# Altium PCB PCB1.PcbDoc
Units mm, origin at the board's own origin, x right, y up, seen from the top; angles counter-clockwise.
Board outline 120 x 60 mm, 2 copper layers (Top Layer, Bottom Layer); 33 components, 25 nets, 108 pads, 0 vias.
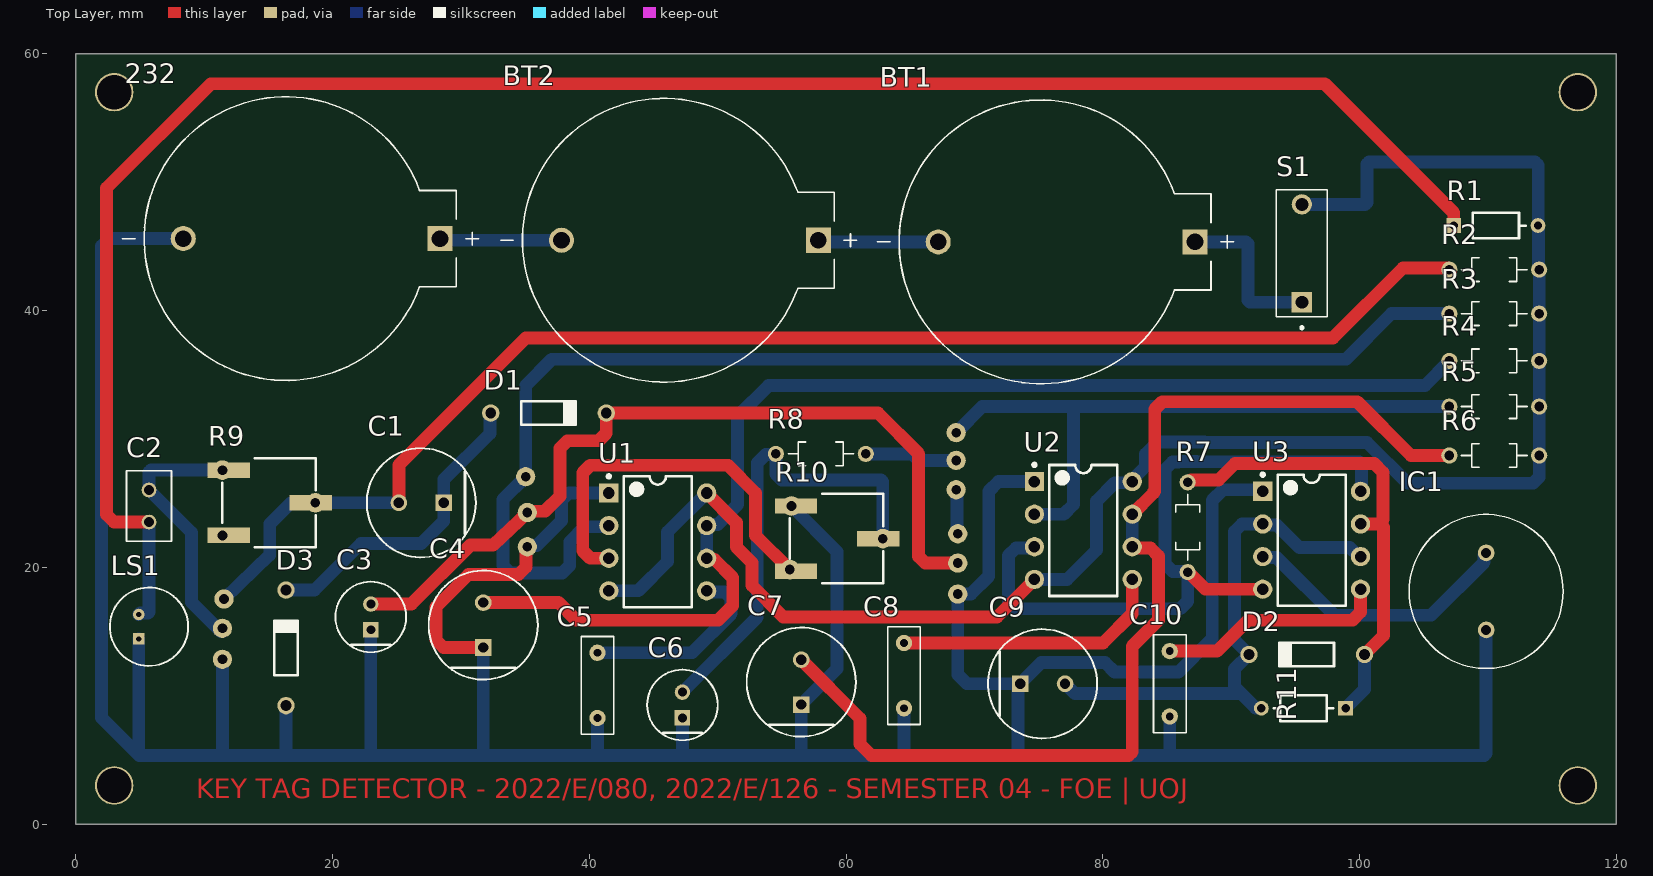
[diagram p0: Top Layer view]
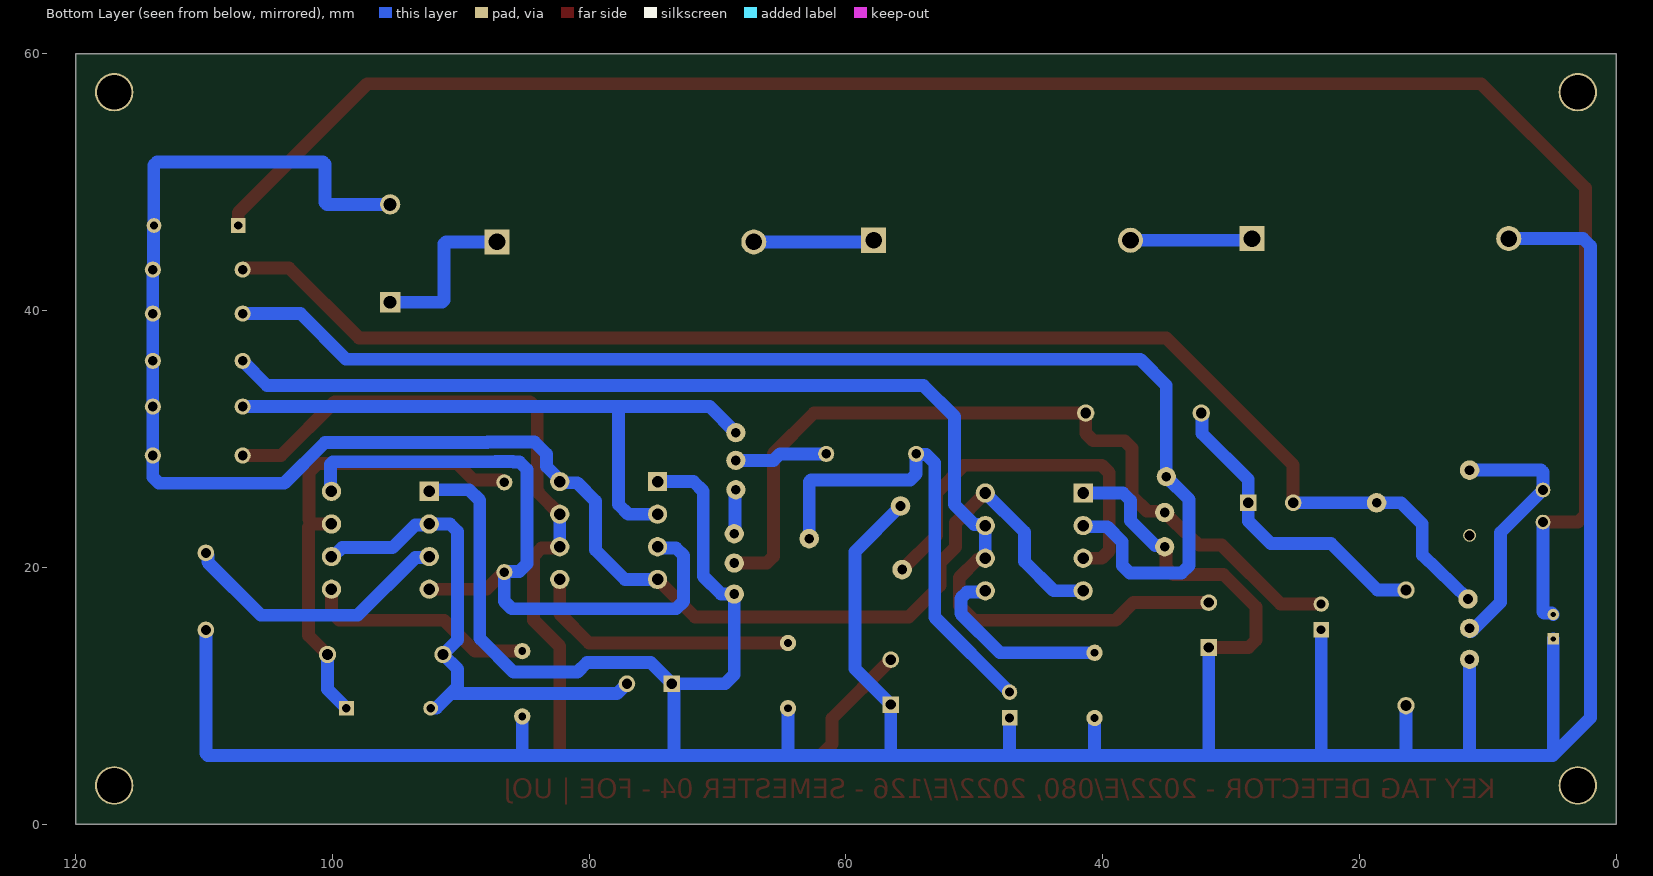
[diagram p1: Bottom Layer view, seen from below]

## Layer stack, top to bottom
Top Solder: solder mask 0.0102, Solder Resist, Dk 3.5
Top Layer: signal copper 0.0356
Dielectric 1: dielectric 0.32, FR-4, Dk 4.8
Bottom Layer: signal copper 0.0356
Bottom Solder: solder mask 0.0102, Solder Resist, Dk 3.5

## Board outline
0,0 0,60 120,60 120,0

## Design rules (kind name [scope] priority, off if disabled: settings)
Clearance [All] p1: gap=0.254 ignorepadtopadclearanceinfootprint=FALSE except(0.5: Arc-Arc Arc-Track Arc-SMDPad Arc-THPad Track-Track Track-SMDPad Track-THPad)
ComponentClearance [All] p1: gap=1 collisioncheckmode=3 verticalgap=1 showdistances=TRUE
PolygonConnect [All] p1: connectstyle=Relief reliefconductorwidth=0.254 reliefentries=4 polygonreliefangle="90 Angle" airgapwidth=0.254
RoutingLayers RoutingLayers_1 [InNetClass('Bottom only')] p1: top layer_v5=TRUE bottom layer_v5=TRUE
RoutingLayers [All] p2: top layer_v5=TRUE bottom layer_v5=TRUE
RoutingVias [All] p1: holewidth=0.711 width=1.27 viastyle="Through Hole" minholewidth=0.711 minwidth=1.27 maxholewidth=0.711 maxwidth=1.27
SolderMaskExpansion [All] p1: expansion=0.102 istentingtop=FALSE
SupplyNets "Schematic Supply Nets" [InNet('GND')] p1: voltage=0.000
UnRoutedNet [All] p1: checkbadconnections=TRUE
Width [All] p1: maxlimit=2 minlimit=1 preferedwidth=1
27 further rules are at their usual default settings.

## Components (designator, comment, footprint, x,y, rotation, side; value= is the part's Value field where it differs from the comment)
232 "BH-25C-1" BAT_BH-25C-1 16.383,45.593 r0 top
BT1 "BH-25C-1" BAT_BH-25C-1 75.183,45.339 r0 top
BT2 "BH-25C-1" BAT_BH-25C-1 45.846,45.466 r0 top
C1 "ECA-2WHG010" FP-ECA-2WHG010-MFG 26.924,25.019 r180 top
C2 "FA16X7R2A224KNU06" CAPRB250W50L550T350H600 5.715,24.765 r90 top
C3 "ECA1JM100" FP-RAD-TH-D_5_0_5-L_11_1-MFG 22.987,16.129 r90 top
C4 "EEUFR1H101" FP-RAD-TH-D_8_0_5-L_11_5-MFG 31.75,15.494 r90 top
C5 "C320C104M1U5TA" LEADED_DECOUPLING_CAP(.1) 40.64,10.795 r270 top
C6 "ECA1JM100" FP-RAD-TH-D_5_0_5-L_11_1-MFG 47.26,9.271 r90 top
C7 "EEUFR1H101" FP-RAD-TH-D_8_0_5-L_11_5-MFG 56.515,11.049 r90 top
C8 "C320C104M1U5TA" LEADED_DECOUPLING_CAP(.1) 64.516,11.557 r270 top
C9 "EEUFR1H101" FP-RAD-TH-D_8_0_5-L_11_5-MFG 75.311,10.922 r0 top
C10 "C320C104M1U5TA" LEADED_DECOUPLING_CAP(.1) 85.217,10.922 r270 top
D1 "1N4148" NXP-SOD27-2_V 36.83,32.004 r0 top
D2 "1N4148" NXP-SOD27-2_V 95.885,13.208 r180 top
D3 "1N4148" NXP-SOD27-2_V 16.383,13.716 r90 top
IC1 "TMB12A12" TMB12A12 109.855,21.113 r270 top
LS1 "POM-2738P-R" FP-POM-2738P-R-MFG 5.715,15.367 r90 top value=2.2kΩ
R1 "CF18JT10K0" FP-CF18-MFG 110.617,46.609 r0 top value=10kΩ
R2 "2-1623928-8" RESAD700W45L350D185 110.49,43.18 r0 top
R3 "2-1623927-3" RESAD700W45L350D185 110.49,39.751 r0 top
R4 "5-1623927-8" RESAD700W45L350D185 110.49,36.068 r0 top
R5 "2-1623928-5" RESAD700W45L350D185 110.49,32.512 r0 top
R6 "CFR16J100K" RESAD700W45L350D185 110.49,28.702 r0 top
R7 "5-1623927-0" RESAD700W45L350D185 86.614,23.114 r270 top
R8 "2-1623928-5" RESAD700W45L350D185 58.039,28.829 r0 top
R9 "3361P-1-104GLF" FP-3361P-MFG 15.113,25.019 r270 top
R10 "3361P-1-104GLF" FP-3361P-MFG 59.309,22.225 r270 top
R11 "CF18JT10K0" FP-CF18-MFG 95.631,9.017 r180 top value=10kΩ
S1 "DS01-254-L-01BE" SW_DS01-254-L-01BE 95.504,44.45 r0 top
U1 "NE555P" P0008A 45.339,21.971 r0 top
U2 "NE555P" P0008A 78.486,22.86 r0 top
U3 "NE555P" P0008A 96.266,22.098 r0 top

## Footprints (in the part's own frame and the unit in brackets; to place one, negate y for a bottom-side part, rotate by r counter-clockwise, add the part's x,y. Pads: shape width x height; smd on the part's side, far side on the other; paste and mask are expansions set on the pad)
BAT_BH-25C-1 [mm]
  round 1.95 hole 1.3: N(-8,0)
  rect 1.95x1.95 / inner round 1.95 / far side rect 1.95x1.95 hole 1.3: P(12,0)
  silkscreen extent -12.75,-11.05 15,11.05
CAPRB250W50L550T350H600 [mm]
  round 1.15 hole 0.8: 1(-1.25,0) 2(1.25,0)
  silkscreen extent -2.75,-1.75 2.75,1.75, body extent -2.75,-1.75 2.75,1.75, height 3
FP-3361P-MFG [mm]
  rect 1.19x3.3 smd paste+0 mask+0: 1(-2.54,-3.2) 2(0,3.2) 3(2.54,-3.2)
  silkscreen extent -3.48,-3.69 3.48,3.6, body extent -3.58,-4.95 3.58,4.95, height 0.25
FP-CF18-MFG [mm]
  rect 1.15x1.15 hole 0.65 paste-2539.97 mask+0: 1(-3.28,0)
  round 1.15 hole 0.65 paste-2539.97 mask+0: 2(3.28,0)
  silkscreen extent -2.3,-1 2.3,1, body extent -3.96,-1.1 3.96,1.1, height 0.25
FP-ECA-2WHG010-MFG [mm]
  rect 1.3x1.3 hole 0.8 paste-2539.97 mask+0: 1(-1.75,0)
  round 1.3 hole 0.8 paste-2539.97 mask+0: 2(1.75,0)
  silkscreen extent -4.25,-4.25 4.25,4.25, body extent -4.35,-4.35 4.35,4.35, height 0.25
FP-POM-2738P-R-MFG [mm]
  rect 0.9x0.9 hole 0.4 paste-2539.97 mask+0: 1(-0.95,0.8)
  round 0.9 hole 0.4 paste-2539.97 mask+0: 2(0.95,0.8)
  silkscreen extent -3.05,-3.05 3.05,3.05, body extent -3.15,-3.15 3.15,3.15, height 0.25
FP-RAD-TH-D_5_0_5-L_11_1-MFG [mm]
  rect 1.2x1.2 hole 0.7 paste-2539.97 mask+0: 1(-1,0)
  round 1.2 hole 0.7 paste-2539.97 mask+0: 2(1,0)
  silkscreen extent -2.75,-2.75 2.75,2.75, body extent -2.85,-2.85 2.85,2.85, height 0.25
FP-RAD-TH-D_8_0_5-L_11_5-MFG [mm]
  rect 1.3x1.3 hole 0.8 paste-2539.97 mask+0: 1(-1.75,0)
  round 1.3 hole 0.8 paste-2539.97 mask+0: 2(1.75,0)
  silkscreen extent -4.25,-4.25 4.25,4.25, body extent -4.35,-4.35 4.35,4.35, height 0.25
LEADED_DECOUPLING_CAP(.1) [mil]
  round 50 hole 24: 1(-100,0) 2(100,0)
  silkscreen extent -150,-50 150,50
NXP-SOD27-2_V [mm] "SOD27, 2-Leads, Dia 1.85mm, Body Length 4.25mm, Pin Spacing 9mm"
  round 1.35 hole 0.85: 1(-4.5,0) 2(4.5,0)
  silkscreen extent -2.12,-0.92 2.12,0.92, body extent -4.78,-0.92 4.78,0.92, height 1.84
P0008A [mm] "DIP, 8-Leads, Body 10.15x6.6mm, Pitch 2.54mm"
  rect 1.5x1.5 hole 0.9: 1(-3.81,3.81)
  round 1.5 hole 0.9: 2(-3.81,1.27) 3(-3.81,-1.27) 4(-3.81,-3.81) 5(3.81,-3.81) 6(3.81,-1.27) 7(3.81,1.27) 8(3.81,3.81)
  silkscreen extent -3.93,-5.1 2.65,5.23, body extent -3.95,-5.07 3.95,5.07, height 5.08
RESAD700W45L350D185 [mm]
  round 1.258 hole 0.75: 1(-3.5,0) 2(3.5,0)
  silkscreen extent -2.55,-0.92 2.55,0.92
SW_DS01-254-L-01BE [mm]
  rect 1.58x1.58 / inner round 1.58 / far side rect 1.58x1.58 hole 1: 1A(0,-3.81)
  round 1.58 hole 1: 1B(0,3.81)
  silkscreen extent -1.98,-5.9 1.98,4.95
TMB12A12 [mm]
  round 1.3 hole 0.8: 1(0,0) 2(6,0)
  silkscreen extent -3,-6 9,6, body extent -2.99,-6 8.99,6, height 9.9

## Part data
232 BT1 BT2: "Battery holder, coin, 20MM 1 CEL PC PIN", Package=None, Check_prices=https://www.snapeda.com/parts/BH-25C-1/Adam+Tech/view-part/?ref=eda, MF="Adam Tech", MP=BH-25C-1, SnapEDA_Link=https://www.snapeda.com/parts/BH-25C-1/Adam+Tech/view-part/?ref=snap
C1: library part CMP-00287-55558411-1, "ECA-2WHG010 Aluminum Electrolytic Capacitor, 1 uF, 450 V, ± 20%, 2000 hours @ 105°C, Radial Leaded", Capacitance=1µF, Case/Package=Radial, Dielectric Material=Aluminium, Max Operating Temperature=105°C, Min Operating Temperature=-25°C, Ripple Current=18mA, Tolerance=20%, Voltage=450V, Contact Plating=Tin, Diameter=8mm, Dissipation Factor=0.24%, Height=11.5mm, Height - Seated (Max)=12.4968mm, Lead Diameter=600µm, Lead Free="Lead Free", Lead Pitch=3.5mm, Lead/Base Style=Straight, Length=11.5mm, Life (Hours)=2000hours, Mount="PCB, Through Hole", NexarPartId=55558411, Number of Pins=2, Packaging=Bulk, Radiation Hardening=No, REACH SVHC="No SVHC", RoHS=Compliant, Schedule B="8532220020, 8532220020", Termination=Radial, Voltage Rating=450V, Voltage Rating (AC)=450V, Voltage Rating (DC)=450V, Width=8mm
C2: "CAP CER 0.22UF 100V X7R RADIAL", Package="Radial TDK", Availability="In Stock", Check_prices=https://www.snapeda.com/parts/FA16X7R2A224KNU06/TDK/view-part/?ref=eda, MF=TDK, MP=FA16X7R2A224KNU06, Price=None, Purchase-URL=https://pricing.snapeda.com/search/part/FA16X7R2A224KNU06/?ref=eda, SnapEDA_Link=https://www.snapeda.com/parts/FA16X7R2A224KNU06/TDK/view-part/?ref=snap
C3 C6: library part CMP-05427-001517-1, "Aluminum Electrolytic Capacitors (Radial Lead Type) 10uF ±20% 63V", Capacitance=10uF, Case/Package=Radial, Dielectric Material=Aluminium, Leakage Current=3uA, Max Operating Temperature=85°C, Min Operating Temperature=-40°C, Package Quantity=200, Ripple Current=70mA, Tolerance=20%, Voltage=63V, Construction=RADIAL, Diameter=5mm, Dissipation Factor=0.11%, Height=11mm, Height - Seated (Max)=0.472inch, Lead Diameter=0.5mm, Lead Free="Lead Free", Lead Pitch=2mm, Lead/Base Style=Straight, Length=11mm, Life (Hours)=2000Hour, Mount="Through Hole", Packaging=Bulk, Radiation Hardening=No, REACH SVHC="No SVHC", RoHS Compliant=Yes, Series=M, Termination=Radial, Voltage Rating=63V, Voltage Rating (DC)=63V, Width=5mm
C4 C7 C9: library part CMP-05427-002079-1, "Aluminum Electrolytic Capacitors (Radial Lead Type) 100uF ±20% 50V", Capacitance=100uF, Case/Package=Radial, ESR (Equivalent Series Resistance)=61mR, Max Operating Temperature=105°C, Min Operating Temperature=-40°C, Package Quantity=200, Ripple Current=870mA, Tolerance=20%, Voltage=50V, Construction=RADIAL, Contact Plating=Tin, Diameter=8mm, Height=11.5mm, Height - Seated (Max)=0.512inch, Impedance=61mR, Lead Diameter=0.6mm, Lead Pitch=3.5mm, Lead/Base Style=Straight, Length=11.5mm, Life (Hours)=6000Hour, Mount="Through Hole", Number of Pins=2, Packaging=Bulk, Radiation Hardening=No, REACH SVHC="No SVHC", Ripple Current (AC)=870mA, RoHS Compliant=Yes, Series=FR, Termination=Radial, Voltage Rating=50V, Voltage Rating (DC)=50V
C5 C8 C10: "0.1ÂµF Â±20% 100V Ceramic Capacitor Z5U Radial", Package="Radial Kemet", Availability=Unavailable, MF=KEMET, MP=C320C104M1U5TA, Price=None, SnapEDA_Link=https://www.snapeda.com/parts/C320C104M1U5TA/KEMET/view-part/546418/?ref=snap
D1 D2 D3: library part CMP-0648-00002-1, "High-speed Diode, 100 V, 450 mA, 2-Pin SOD27, RoHS", Manufacturer="NXP Semiconductors", Cd="4 pF Max.", ComponentLink1Description="Manufacturer URL", ComponentLink1URL=http://www.nxp.com/, ComponentLink2Description=Datasheet, ComponentLink2URL=http://www.nxp.com/documents/data_sheet/1N4148_1N4448.pdf, ComponentLink3Description="Package Specification", ComponentLink3URL=http://www.nxp.com/documents/data_sheet/1N4148_1N4448.pdf, Configuration=Single, DatasheetVersion=Aug-04, IF="200 mA Max.", IFRM="450 mA", IFSM="4 A Max.", IR (VR="20 V)=25 nA", Mounting Technology="Through Hole", PackageDescription="2-Pin Hermetically Sealed Glass Package, Axial Leaded, Dia 1.85 mm, Body Length 4.25 mm, Lead Spread 25.4 mm", PackageReference=SOD27, PackageVersion=Aug-04, PartNumber=1N4148, RoHS=TRUE, Trr="4 ns Max.", VF (IF="10 mA)=1 V", VR="100 V Max."
IC1: "Integrated Circuit", Manufacturer_Name="Jiangsu Huaneng Elec", Datasheet Link=https://datasheet.lcsc.com/szlcsc/Jiangsu-Huaneng-Elec-TMB12A12_C96079.pdf, Height=9.8mm, Manufacturer_Part_Number=TMB12A12
LS1: library part CMP-103887-000001-1, "MIC COND ANALOG OMNI -38DB", Current=0.5mA, Manufacturer="PUI Audio, Inc.", Max Supply Voltage=10V, Operating Supply Voltage=2V, Package=0, Resistance=2.2kΩ, Automotive=No, Category=Speak, ComponentLink2Description=Datasheet, ComponentLink2URL=http://www.puiaudio.com/pdf/POM-2738P-R.pdf, Device Class L1=Electromechanical, Device Class L2="Audio Products", Device Class L3=Microphones, Digikey Description="MIC COND ANALOG OMNI -38DB", Direction=Omidirectional, Height=2.9mm, Lead Free=Yes, Manufacturer Part Number=POM-2738P-R, Mouser Description="Mic Omni-Directional 2200Ohm -38±3dB 10Vdc Round Pin", Octopart=https://octopart.com/pom-2738p-r-pui+audio-19251807, RoHS=TRUE
R1 R11: library part CMP-26528-000002-1, "RES 10K OHM 1/8W 5% CF AXIAL", Manufacturer="Stackpole Electronics", Package=CF18, Power Rating=0.125W, Resistance=10kΩ, Temperature="-55°C to +155°C", Temperature Coefficient=0-500ppm/°C, Temperature Range High=+155°C, Temperature Range Low=-55°C, Tolerance=5%, Voltage Rating=250V, Automotive=No, Category=Res, ComponentLink2Description=Datasheet, ComponentLink2URL=http://www.seielect.com/Catalog/SEI-CF_CFM.pdf, Composition="Carbon Film", Device Class L1="Passive Components", Device Class L2=Resistors, Device Class L3="Through-Hole Resistors", Digikey Description="RES 10K OHM 1/8W 5% CF AXIAL", Height=2mm, Ipc Land Pattern Name=RESAD656W65L360D200, Lead Free=Yes, Manufacturer Part Number=CF18JT10K0, Octopart=https://octopart.com/cf18jt10k0-stackpole+electronics-19205642, RoHS=TRUE, Series=CF
R2 R4 R7: "CFR16 5% 10K", Package=None, Availability=Unavailable, Price=None
  R2: MP=2-1623928-8
  R4: MP=5-1623927-8
  R7: MP=5-1623927-0
R3: "Carbon Film Resistors - Through Hole 1K Ohm 5% 1/4W Res Carbon Film", Package=None, Power_Rating=".25 W", Resistance=1K, Tolerance=5%, Voltage_Rating="200 V", Availability="In Stock", Check_prices=https://www.snapeda.com/parts/2-1623927-3/TE+Connectivity/view-part/?ref=eda, EU_RoHS_Compliance=Compliant, MF="TE Connectivity", MP=2-1623927-3, Price=None, Purchase-URL=https://pricing.snapeda.com/search/part/2-1623927-3/?ref=eda, SnapEDA_Link=https://www.snapeda.com/parts/2-1623927-3/TE+Connectivity/view-part/?ref=snap
R5 R8: "470 Ohms Â±5% 0.25W, 1/4W Through Hole Resistor Axial - Carbon Film", Package=None, Power_Rating=".25 W", Resistance=470, Tolerance=5%, Voltage_Rating="200 V", Availability="In Stock", Check_prices=https://www.snapeda.com/parts/2-1623928-5/TE+Connectivity/view-part/?ref=eda, EU_RoHS_Compliance=Compliant, MF="TE Connectivity", MP=2-1623928-5, Price=None, SnapEDA_Link=https://www.snapeda.com/parts/2-1623928-5/TE+Connectivity/view-part/?ref=snap
R6: "100 kOhms Â±5% 0.25W, 1/4W Through Hole Resistor Axial - Carbon Film", Package=None, Availability="In Stock", Check_prices=https://www.snapeda.com/parts/CFR16J100K/TE+Connectivity/view-part/?ref=eda, MF="TE Connectivity Passive Product", MP=CFR16J100K, Price=None, Purchase-URL=https://pricing.snapeda.com/search/part/CFR16J100K/?ref=eda, SnapEDA_Link=https://www.snapeda.com/parts/CFR16J100K/TE+Connectivity/view-part/?ref=snap
R9 R10: library part CMP-07234-000051-1, "TRIMMER 100K OHM 0.5W GW TOP ADJ", Color=Natural, Max Operating Temperature=125°C, Max Power Dissipation=500mW, Min Operating Temperature=-55°C, Package Quantity=1, Resistance=100kR, Resistance Tolerance=10%, Resistor Type=Cermet, Temperature Coefficient=100ppm/°C, Voltage Rating=300V, Depth=8.53mm, Height=0.192inch, Lead Free="Lead Free", Length=6.71mm, Military Standard=Not, Mount="Surface Mount", Number of Turns=1, Packaging="Tape and Reel", Power Rating=500mW, Radiation Hardening=No, REACH SVHC="No SVHC", RoHS Compliant=Yes, Series="Trimpot® 3361 - Sealed", Taper=Linear, Technology=CERMET, Termination="Gull Wing", Tolerance=10%, Voltage Rating (DC)=300V, Weight=0.02oz, Width=0.264inch
S1: "1 Position, Through Hole, 2.54 mm Pitch, Raised Slide Actuator, Flat Bottom, Long Pin, DIP Switch", Package=None, Availability="In Stock", Check_prices=https://www.snapeda.com/parts/DS01-254-L-01BE/CUI+Devices/view-part/?ref=eda, CUI_purchase_URL=https://www.cuidevices.com/product/switches/dip-switches/ds01-254-series?utm_source=snapeda.com&utm_medium=referral&utm_campaign=snapedaBOM, MF="CUI Devices", MP=DS01-254-L-01BE, Price=None, Purchase-URL=https://pricing.snapeda.com/search/part/DS01-254-L-01BE/?ref=eda, SnapEDA_Link=https://www.snapeda.com/parts/DS01-254-L-01BE/CUI+Devices/view-part/?ref=snap
U1 U2 U3: library part CMP-2000-04954-1, "Precision Timer, 4.5 to 16 V, 0 to 70 degC, 8-Pin DIP, Pb-Free, Tube", Manufacturer=TexasInstruments, Maximum High Level Output Current=-200mA, Maximum Low Level Output Current=200mA, Operating Supply Voltage=5, Package=8PDIP, Package Description="8-Pin Double In-line Package, Body 9.59 x 6.35 mm, Pitch 2.54 mm", Package Reference=P8, Category=Timer, Datasheet URL=http://www.ti.com/general/docs/lit/getliterature.tsp?genericPartNumber=NE555&fileType=pdf, Datasheet Version="Rev. I, 09/2014", Manufacturer URL=http://www.ti.com/, Number of Internal Timers=1, Package URL=http://www.ti.com/lit/ml/mpdi001b/mpdi001b.pdf, Packaging=Rail/Tube, Rad Hard=No, Type=Standard

## Free pads (board coordinates)
  round 3 hole 2.7: 2(3,3) 2(3,57) 2(117,3) 2(117,57)
  round 1.524 hole 0.762: 3(55.753,24.765) 4(62.865,22.225) 5(55.626,19.812) 6(11.43,27.559) 8(18.669,25.019)
  round 1 hole 0.762: 9(11.43,22.479)
  round 1.5 hole 0.762: 10(11.43,12.827) 11(11.43,15.24) 12(11.557,17.526) 17(68.58,30.48) 18(68.58,28.321) 19(68.58,26.035) 20(68.707,22.606) 21(68.707,20.32) 22(68.707,17.907) 23(35.052,27.051) 24(35.179,24.257) 25(35.179,21.59)

## Nets (pads, with @x,y where several pads share a name; then routed paths per layer and width w, separated by ;. In a path a pad name is that pad's centre, name@x,y a point inside that pad or via, vN(x,y) a via of type N, cw(c..) or ccw(c..) an arc to the next point about the centre after c; other vN are vias at no path point)
GND: 232.N C3.1 C4.1 C5.2 C6.1 C7.1 C8.2 C9.1 C10.2 D3.1 IC1.2 LS1.1 pad.3 pad.10 pad.22 pad.25 R10.1 U1.1 U2.1 U3.1 | length 323.5
  Top Layer w1: C4.1 28.653,13.744 28.067,14.33 28.067,16.891 30.607,19.431 34.498,19.431 35.083,20.017 35.083,21.494 pad.25
  Bottom Layer w1: LS1.1 4.915,5.372 ; 232.N 2.596,45.593 2.01,45.007 2.01,8.277 4.915,5.372 ; pad.10 11.43,5.334 ; D3.1 16.383,5.334 ; C3.1 22.987,5.334 ; C4.1 31.75,5.334 ; pad.25 35.275,21.686 35.91,21.686 37.846,23.622 37.846,25.195 38.432,25.781 U1.1 ; C5.2 40.64,5.334 ; C6.1 47.26,5.35 47.244,5.334 ; pad.3 59.309,21.209 59.309,12.093 C7.1 56.515,5.334 ; C8.2 64.516,5.334 ; U2.1 71.882,26.67 71.12,25.908 71.12,19.304 69.723,17.907 pad.22 68.707,11.635 69.42,10.922 C9.1 ; C10.2 85.217,5.334 ; U3.1 92.329,26.035 89.359,26.035 88.531,25.207 88.531,14.464 88.427,14.36 85.894,11.827 80.925,11.827 80.18,12.572 75.211,12.572 C9.1 ; IC1.2 109.855,5.483 109.706,5.334 85.217,5.334 ; 4.915,5.372 4.953,5.334 11.43,5.334 ; 11.43,5.334 16.383,5.334 ; 16.383,5.334 22.987,5.334 ; 22.987,5.334 31.75,5.334 ; 31.75,5.334 40.64,5.334 ; 40.64,5.334 47.244,5.334 ; 47.244,5.334 56.515,5.334 ; 56.515,5.334 64.516,5.334 ; 64.516,5.334 68.707,5.334 73.406,5.334 ; 73.406,5.334 85.217,5.334 ; 73.406,5.334 73.406,10.767 C9.1
Net232_P: 232.P BT2.N | length 9.5
  Bottom Layer w0.254: 232.P 232.P@28.51,45.466
  Bottom Layer w1: 232.P@28.51,45.466 BT2.N
NetBT1_N: BT1.N BT2.P | length 9.4
  Bottom Layer w0.254: BT2.P BT2.P@57.973,45.339
  Bottom Layer w1: BT2.P@57.973,45.339 BT1.N
NetBT1_P: BT1.P S1.1A | length 12.8
  Bottom Layer w1: BT1.P 91.164,45.339 91.313,45.19 91.313,40.789 91.462,40.64 S1.1A
NetC1_1: C1.1 D1.1 D3.2 | length 24.4
  Bottom Layer w1: D3.2 18.597,18.216 22.225,21.844 26.924,21.844 28.674,23.594 28.674,26.824 32.263,30.413 32.263,31.937 D1.1
NetC1_2: C1.2 pad.8 pad.12 R2.1 R9.2 | length 109.3
  Top Layer w1: C1.2 25.174,27.968 35.052,37.846 97.917,37.846 103.378,43.307 106.863,43.307 R2.1
  Bottom Layer w1: pad.12 15.113,20.955 15.113,23.368 16.764,25.019 pad.8 C1.2
NetC2_1: C2.1 LS1.2 R1.1 | length 150.3
  Top Layer w1: C2.1 2.999,23.515 2.413,24.101 2.413,49.53 10.541,57.658 97.282,57.658 107.337,47.603 R1.1
  Bottom Layer w1: LS1.2 5.039,16.441 5.646,16.441 5.715,16.51 C2.1
NetC2_2: C2.2 pad.6 pad.11 R9.1 | length 20.7
  Bottom Layer w1: pad.6 5.864,27.559 5.715,27.41 C2.2 9.017,22.713 9.017,17.272 11.303,14.986 pad.11@11.459,14.986
NetC3_2: C3.2 D1.2 pad.21 pad.24 | length 64.5
  Top Layer w1: C3.2 26.146,17.129 30.734,21.717 32.512,21.717 pad.24 35.275,24.353 36.545,24.353 37.719,25.527 37.719,29.259 38.305,29.845 40.744,29.845 41.33,30.431 D1.2 62.484,32.004 65.659,28.829 65.659,20.828 66.167,20.32 pad.21
NetC4_2: C4.2 R4.1 U1.6 U1.7 | length 95
  Top Layer w1: C4.2 37.62,17.244 38.989,15.875 50.038,15.875 51.181,17.018 51.181,19.177 49.753,20.605 49.245,20.605 U1.6
  Bottom Layer w1: U1.6 U1.7 49.245,23.337 50.007,23.337 51.562,24.892 51.562,31.75 53.975,34.163 105.085,34.163 R4.1
NetC5_1: C5.1 U1.5 | length 15
  Bottom Layer w1: C5.1 48.006,13.335 51.054,16.383 51.054,17.575 50.564,18.065 49.245,18.065 U1.5
NetC6_2: C6.2 pad.4 R8.1 R10.2 | length 36.6
  Bottom Layer w1: C6.2 53.086,16.097 53.086,28.114 53.751,28.78 54.49,28.78 R8.1 54.539,27.249 54.991,26.797 62.716,26.797 62.865,26.648 pad.4
NetC7_2: C7.2 R6.1 U2.6 U2.7 | length 85
  Top Layer w1: C7.2 61.087,8.227 61.087,6.223 61.976,5.334 82.003,5.334 82.296,5.627 82.296,13.843 84.328,15.875 84.328,20.877 83.711,21.494 82.392,21.494 U2.6 ; U2.7 83.947,25.781 83.947,25.846 84.046,25.945 84.046,32.307 84.632,32.893 99.822,32.893 104.013,28.702 R6.1
  Bottom Layer w1: U2.6 U2.7
NetC8_1: C8.1 U2.5 | length 21.4
  Top Layer w1: C8.1 80.01,14.097 82.296,16.383 U2.5
NetC9_2: C9.2 D2.2 R11.2 U3.2 U3.6 | length 41
  Bottom Layer w1: C9.2 77.823,10.16 90.551,10.16 90.67,10.279 ; R11.2 92.322,9.046 91.904,9.046 90.67,10.279 ; U3.2 92.539,23.285 93.555,23.285 95.308,21.532 99.24,21.532 99.945,20.828 U3.6 ; U3.2@92.591,23.368 90.848,23.368 90.262,22.782 90.262,14.331 D2.2 90.262,12.085 90.262,10.687 90.67,10.279
NetC10_1: C10.1 U3.5 | length 17.9
  Top Layer w1: C10.1 88.9,13.462 91.313,15.875 99.441,15.875 100.076,16.51 U3.5
NetD2_1: D2.1 R7.1 R11.1 U3.7 | length 37.5
  Top Layer w1: R7.1@86.564,26.564 86.634,26.564 86.861,26.791 89.021,26.791 90.297,28.067 101.141,28.067 101.826,27.382 101.826,23.721 101.473,23.368 ; U3.7 101.6,23.368 101.854,23.114 101.854,14.677 D2.1
  Bottom Layer w1: R11.1 100.385,10.491 D2.1
NetIC1_1: IC1.1 U3.3 | length 21.6
  Bottom Layer w1: U3.3 92.539,20.745 93.555,20.745 98.044,16.256 105.565,16.256 109.702,20.393 109.702,20.96 IC1.1
NetQ1_1: pad.17 R5.1 U2.2 | length 50.3
  Bottom Layer w1: pad.17 70.612,32.512 77.724,32.512 R5.1 ; U2.2 76.962,24.13 77.724,24.892 77.724,32.258 77.978,32.512
NetQ1_2: pad.18 R8.2 | length 7.3
  Bottom Layer w1: R8.2 65.151,28.829 65.659,28.321 pad.18
NetQ1_3: pad.19 pad.20 | length 3.5
  Bottom Layer w1: pad.19 68.644,25.971 68.644,22.669 pad.20
NetQ2_1: pad.23 R3.1 U1.2 | length 100.3
  Top Layer w1: U1.2@41.402,23.114 U1.2
  Bottom Layer w1: U1.2 41.433,23.145 39.655,23.145 38.481,21.971 38.481,20.144 37.895,19.558 33.86,19.558 33.274,20.144 33.274,25.273 pad.23 35.052,34.163 37.084,36.195 98.933,36.195 102.489,39.751 R3.1
NetR1_2: R1.2 R2.2 R3.2 R4.2 R5.2 R6.2 S1.1B U1.4 U1.8 U2.4 U2.8 | length 139.1
  Top Layer w1: U1.8 51.459,23.471 51.459,21.566 52.681,20.344 52.681,18.566 55.118,16.129 71.755,16.129 U2.4
  Bottom Layer w1: U1.4 43.815,18.161 46.101,20.447 46.101,22.733 U1.8 ; U2.4 77.216,19.05 79.502,21.336 79.502,25.146 80.93,26.574 82.2,26.574 82.2,26.71 83.336,27.845 83.336,28.815 84.263,29.742 85.317,29.742 85.318,29.743 87.91,29.743 87.935,29.719 100.583,29.719 103.759,26.543 113.516,26.543 113.99,27.017 R6.2 R5.2 R4.2 R3.2 R2.2 113.944,43.226 113.944,46.563 R1.2 113.919,46.631 113.919,51.308 113.665,51.562 100.733,51.562 100.584,51.413 100.584,48.409 100.435,48.26 S1.1B
NetR7_2: R7.2 U2.3 U3.4 U3.8 | length 56.2
  Top Layer w1: R7.2 86.684,19.614 88.01,18.288 U3.4
  Bottom Layer w1: U2.3 74.58,21.494 73.23,21.494 72.644,20.909 72.644,17.35 73.23,16.764 86.028,16.764 86.614,17.35 R7.2 86.565,19.663 85.443,19.663 84.836,20.271 84.836,27.608 85.422,28.194 85.89,28.194 85.939,28.243 87.289,28.243 87.314,28.218 99.963,28.218 100.158,28.022 100.158,26.022 100.177,26.004 100.172,26.004 U3.8
NetR10_3: pad.5 R10.3 U1.3 | length 30
  Top Layer w1: U1.3 40.083,20.701 39.497,21.287 39.497,27.354 40.083,27.94 50.8,27.94 52.959,25.781 52.959,22.479 pad.5
pads on no net: R9.3

## Other copper
Top Layer:
  text "KEY TAG DETECTOR - 2022/E/080, 2022/E/126 - SEMESTER 04 - FOE | UOJ" at 9.39,2.008 h1.52